# EAGLE board Perifericos (EAGLE 9.1.1)
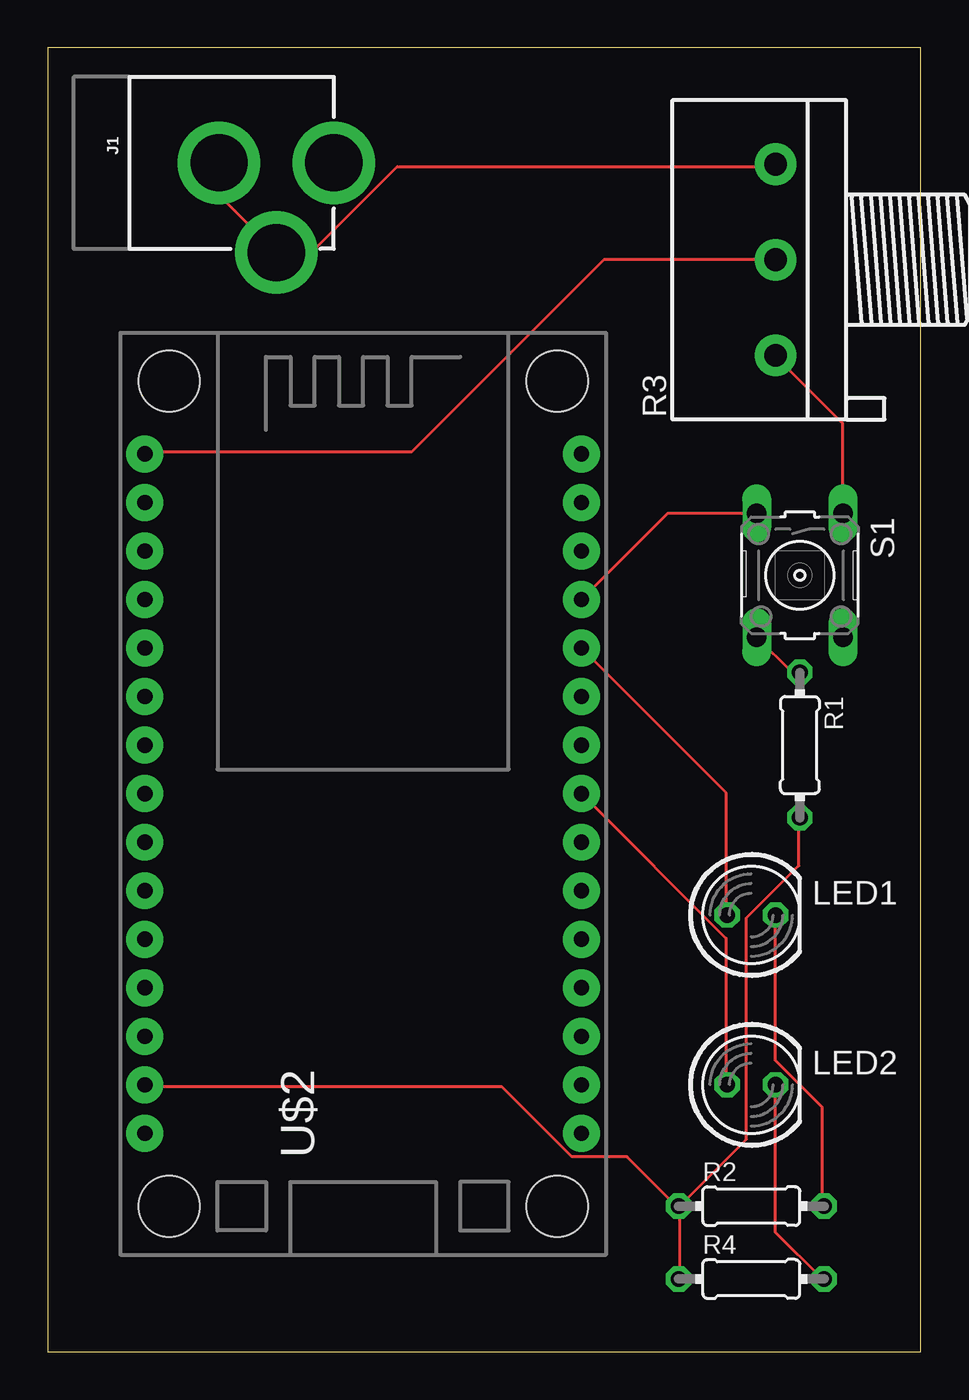
[diagram p0: board, top side]
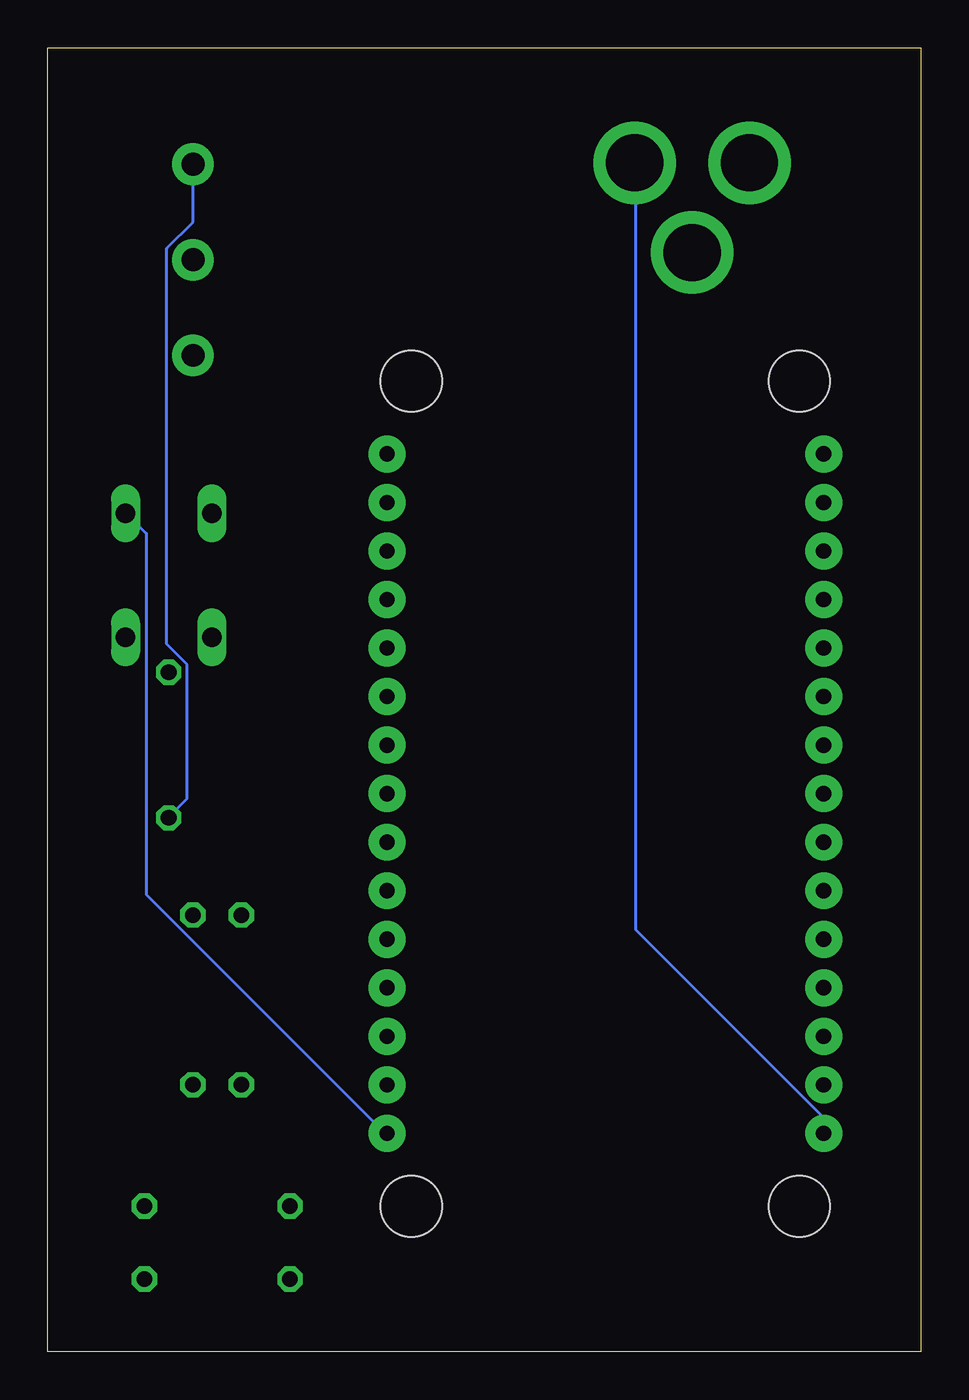
[diagram p1: board, bottom side, seen from below]

Size 45.7 x 68.25 mm. Coordinates in mm from the lower left corner, seen from the top.
Outline: 0,0 45.7,0 45.7,68.25 0,68.25 0,0
Copper layers (1*16): Top 0.035mm / dielectric 1.5mm / Bottom 0.035mm
Design rules "default": minimum track width 6mil, minimum drill 0.35mm, track to track 6mil, track to pad 6mil, pad to pad 6mil, via to via 6mil, smd to smd 6mil, copper to edge 40mil, drill to drill 6mil, minimum pad ring 10mil, minimum via ring 8mil, stop-mask expansion 4mil, vias tented up to drill 0mil, thermal gap 10mil

## Footprints (pad centres in the part's own frame; a part is rotated, then mirrored left to right if it is on the bottom)
POWER_JACK_PTH = drill 2.997 pad 4.318: GND 0,7.7; GNDBREAK 4.7,10.7; PWR 0,13.7
LED5MM = drill 0.813 octagon: A -1.27,0; K 1.27,0
0204/7 = drill 0.813 octagon: 1 -3.81,0; 2 3.81,0
3RP/1610N = drill 1.2 pad 2.184: 1 -5,0; 2 0,0; 3 5,0
B3F-10XX = drill 1.016 long: 1 -3.251,2.261; 2 3.251,2.261; 3 -3.251,-2.261; 4 3.251,-2.261
ESP12E_DEVKIT = drill 0.8 pad 1.93: 3V3@0 -11.43,-7.62; 3V3@1 11.43,5.08; 3V3@2 11.43,-17.78; AD0 -11.43,17.78; CLK -11.43,-2.54; CMD -11.43,2.54; D0 11.43,17.78; D1 11.43,15.24; D2 11.43,12.7; D3 11.43,10.16; D4 11.43,7.62; D5 11.43,0; D6 11.43,-2.54; D7 11.43,-5.08; D8 11.43,-7.62; EN -11.43,-10.16; GND@0 -11.43,-5.08; GND@1 -11.43,-15.24; GND@2 11.43,2.54; GND@3 11.43,-15.24; RST -11.43,-12.7; RSV@0 -11.43,15.24; RSV@1 -11.43,12.7; RX 11.43,-10.16; SD0 -11.43,0; SD1 -11.43,5.08; SD2 -11.43,7.62; SD3 -11.43,10.16; TX 11.43,-12.7; VIN -11.43,-17.78 | hole 3.2: -10.16,21.59; 10.16,21.59; 10.16,-21.59; -10.16,-21.59

## Placement (x,y rotation side)
J1  POWER_JACK  [POWER_JACK_PTH]  1.27,62.23 270 top
LED1  [LED5MM]  36.83,22.86 0 top
LED2  [LED5MM]  36.83,13.97 0 top
R1  100K  [0204/7]  39.37,31.75 270 top
R2  100  [0204/7]  36.83,7.62 0 top
R3  [3RP/1610N]  38.1,57.15 90 top
R4  100  [0204/7]  36.83,3.81 0 top
S1  [B3F-10XX]  39.37,40.64 270 top
U$2  ESP12E_DEVKIT  [ESP12E_DEVKIT]  16.51,29.21 0 top

## Library data of the parts
J1 = SparkFun-Connectors; PROD_ID: CONN-08197
LED1 LED2 = led
R1 R2 R4 = rcl; SPICEPREFIX: R
R3 = pot
S1 = switch-omron; MPN: B3F-1000; OC_FARNELL: 176432; OC_NEWARK: 36M3542
U$2 = ESP12E_DEVKIT

## Nets
3.3V: R3.1 S1.1 U$2.3V3@2
ANALOG: R3.2 U$2.AD0
GND: J1.GND J1.GNDBREAK R1.2 R2.1 R3.3 R4.1 U$2.GND@1
GPIO_0: S1.3 U$2.D3
GPIO_2: LED1.A U$2.D4
GPIO_14~: LED2.A U$2.D5
N$1: LED2.K R4.2
N$2: R1.1 S1.4
N$4: LED1.K R2.2
VCC: J1.PWR U$2.VIN

## Tracks (layer width: path | path; a pad name or v marks a point on that pad's centre or on a via)
3.3V
  Top 0.152: S1.1 41.6,43.89 41.6,48.62 38.1,52.12 R3.1
  Bottom 0.152: U$2.3V3@2 28.04,11.43 40.54,23.93 40.54,42.82 41.6,43.89 S1.1
ANALOG
  Top 0.152: R3.2 29.11,57.15 19.05,47.09 5.18,47.09 U$2.AD0
GND
  Top 0.152: R3.3 38.1,62.03 18.29,62.03 13.87,57.61 12.04,57.61 J1.GNDBREAK 11.89,57.61 8.99,60.5 8.99,62.18 J1.GND | 33.07,7.62 33.07,3.81 R4.1 | 33.07,7.62 R2.1 | 33.07,7.62 36.58,11.12 36.58,22.71 39.32,25.45 39.32,27.89 R1.2 | 33.07,7.62 R2.1 | U$2.GND@1 5.18,13.87 23.77,13.87 27.43,10.21 30.33,10.21 32.92,7.62 R2.1
  Bottom 0.152: R3.3 38.1,62.03 38.1,59.13 39.47,57.76 39.47,37.03 38.41,35.97 38.41,28.96 39.32,28.04 R1.2
GPIO_0
  Top 0.152: S1.3 37.03,43.89 32.46,43.89 28.04,39.47 U$2.D3
GPIO_2
  Top 0.152: LED1.A 35.51,22.86 35.51,29.26 28.04,36.73 U$2.D4
GPIO_14~
  Top 0.152: LED2.A 35.51,14.02 35.51,21.64 28.04,29.11 U$2.D5
N$1
  Top 0.152: LED2.K 38.1,13.87 38.1,6.25 40.54,3.81 R4.2
N$2
  Top 0.152: R1.1 39.32,35.66 38.86,35.66 37.19,37.34 S1.4
N$4
  Top 0.152: LED1.K 38.1,15.24 40.54,12.8 40.54,7.62 R2.2
VCC
  Bottom 0.152: U$2.VIN 5.18,11.43 5.18,12.34 14.94,22.1 14.94,62.18 J1.PWR